# Altium PCB PCB V1.0.PcbDoc (part 2 of 3)
Units mil, origin at the board's own origin, x right, y up, seen from the top; angles counter-clockwise.
Board outline 1771.65 x 1771.65 mil, 6 copper layers (SIG/GND1, GND1, PWR, SIG/GND2, GND2, SIG/GND3), stack 60.866 mil thick; 267 components, 128 nets, 828 pads, 918 vias.
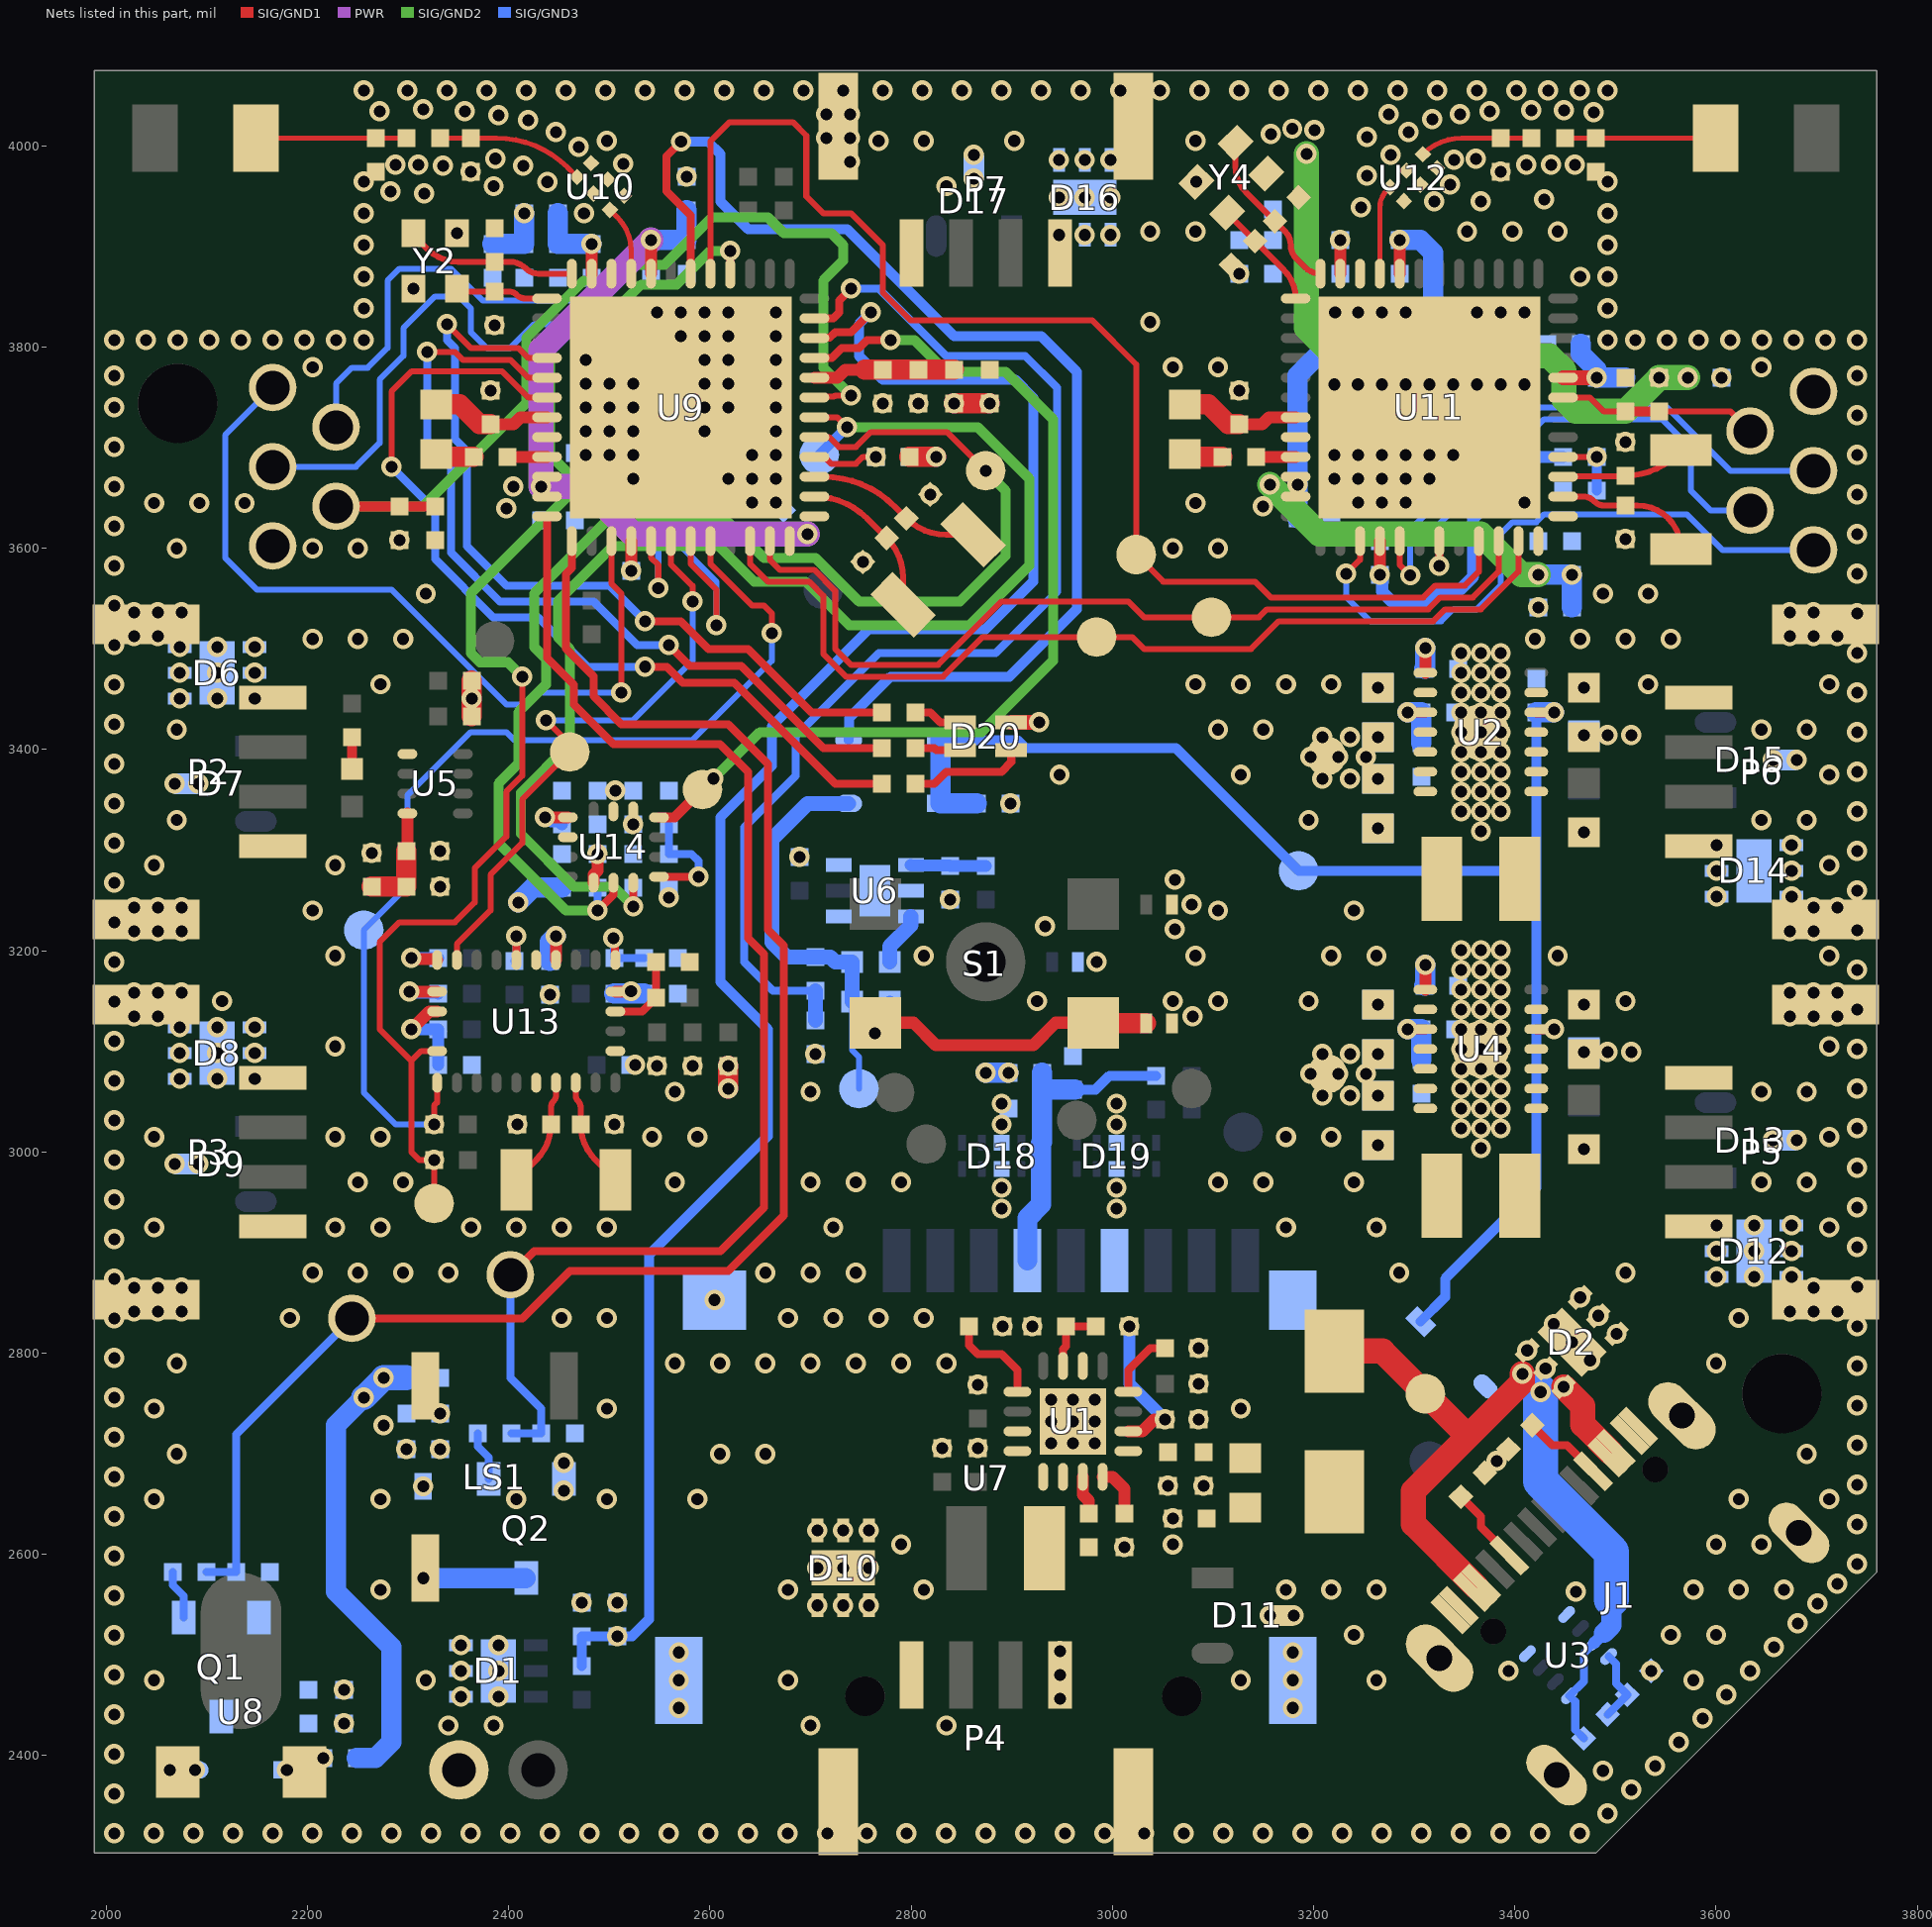
[diagram p6: the nets of this part, all layers, seen from the top]

## Via types
v1: diameter 20, hole 12, SIG/GND1 to SIG/GND3, tented both sides, 851 vias
v2: diameter 19.68, hole 11.81, SIG/GND1 to SIG/GND3, tented both sides, 67 vias

## Nets (pads, with @x,y where several pads share a name; then routed paths per layer and width w, separated by ;. In a path a pad name is that pad's centre, name@x,y a point inside that pad or via, vN(x,y) a via of type N, cw(c..) or ccw(c..) an arc to the next point about the centre after c; other vN are vias at no path point) (continued)
3V3_BZ: C34.1 C35.1 D22.1 FB7.2 LS1.1
  other v1: 2314.96,2667.72 2331.69,2704.72 2331.69,2740.16
3V3_EN: C25.2 D3.1 D4.1 D5.1 R12.1 T20.0 U2.12 U4.12 | length 1468.9
  SIG/GND1 w10: U4.12@3421.26,3122.05 v1(3438.98,3122.05) ; U2.12@3421.26,3437.01 v1(3438.98,3437.01)
  SIG/GND3 w10: D4.1@2829.13,3409.45 2905.51,3409.45 2913.39,3401.57 3062.99,3401.57 T20.0@3185.04,3279.53 3421.26,3279.53 ; D3.1@3306.29,2831.51 3330.71,2855.92 3330.71,2874.02 3421.26,2964.57 3421.26,3122.05 ; R12.1@3421.26,3437.01 3421.26,3279.53 ; v1(3438.98,3122.05) 3421.26,3122.05 ; 3421.26,3122.05 3421.26,3279.53
  SIG/GND3 w20: D4.1@2829.13,3409.45 D5.1@2829.13,3346.46 C25.2@2865.16,3346.46 ; R12.1@3421.26,3437.01 v1(3438.98,3437.01)
3V3_ERM: C32.1 C33.1 D21.1 FB6.2 U8.1
  other v1: 2179.53,2385.83 2215.55,2397.64 2236.22,2432.09
3V3_FB: R8.2 R9.2 U2.3 | length 62
  SIG/GND1 w10: v1(3293.31,3437.01) U2.3@3311.02,3437.01
  SIG/GND3 w20: v1(3293.31,3437.01) R9.2@3307.09,3437.01 R8.2@3307.09,3406.5
3V3_ICM: C86.1 C87.1 C88.1 FB15.1 R59.1 R60.1 R61.1 U14.5 U14.8 U14.12 | length 85.2
  SIG/GND1 w8: v1(2523.62,3325.79) U14.5@2523.62,3338.58
  SIG/GND1 w12: v1(2436.02,3332.68) U14.8@2458.66,3332.68 ; U14.12@2484.25,3267.72 2484.25,3275.81 2488.19,3279.75 v1(2488.19,3296.26)
  SIG/GND3 w12: v1(2436.02,3332.68) 2438.19,3332.68 2442.22,3328.65 2449.9,3328.65 C88.1@2452.76,3325.79
3V3_main: C11.1 C12.1 C13.1 C14.1 C36.1 C39.1 C40.1 C51.1 C58.1 C61.1 C62.1 C73.1 D20.2 FB4.1 FB5.1 FB6.1 FB7.1 FB8.2 FB9.2 FB10.1 FB11.2 FB12.2 FB13.1 FB14.1 FB15.2 R7.2 R8.1 R17.2 R18.2 R35.2 R36.2 R38.2 R39.2 T4.0 U2.4 U2.5 U9.40 U11.40 | length 1753.9
  SIG/GND1 w12: v1(2521.65,3577.76) U9.40@2521.65,3607.28 ; v1(3265.75,3573.82) U11.40@3265.75,3607.28
  SIG/GND1 w15: D20.2@2899.41,3427.17 v1(2927.17,3427.17)
  SIG/GND1 w20: R18.2@2363.19,3433.07 v1(2363.19,3450.79) R17.2@2363.19,3468.5 ; v1(2618.11,3062.99) v1(2618.11,3085.63) ; R36.2@2798.23,3690.94 v1(2824.8,3690.94) ; v1(2842.52,3744.09) v1(2877.95,3744.09)
  SIG/GND2 w25: v1(3192.91,3992.13) 3192.91,3818.9 3220.47,3791.34 3434.17,3791.34 3448.82,3776.69 3448.82,3748.03 3460.63,3736.22 3509.84,3736.22 v1(3543.31,3769.69) v1(3571.85,3769.68)
  SIG/GND3 w12: v1(3265.75,3573.82) 3268.05,3571.52 3268.05,3556.95 3277.75,3547.24 3314.96,3547.24 3326.77,3559.06 3345.55,3559.06 3358.27,3571.77 3358.27,3629.92 3419.29,3690.94 R39.2@3447.83,3690.94
  SIG/GND3 w20: FB6.1@2249.02,2397.64 2267.72,2397.64 2283.46,2413.39 2283.46,2507.87 2228.35,2562.99 2228.35,2728.35 v1(2255.91,2755.91) ; C39.1@2383.86,3902.56 C40.1@2415.35,3902.56 v1(2415.35,3933.07) ; v1(2409.45,3248.03) 2424.21,3262.8 FB15.2@2452.76,3262.8 ; v1(2874.02,3078.74) v1(2896.65,3078.74) ; v1(3543.31,3769.69) v1(3571.85,3769.68)
  SIG/GND3 w25: v1(2255.91,2755.91) v1(2275.59,2775.59) FB7.1@2298.23,2775.59
  other v1: 3085.63,2769.69 2263.78,3297.24 3208.66,3371.06 3236.22,3371.06 3263.78,3371.06 3196.85,3392.72 3224.41,3392.72 3251.97,3392.72 3208.66,3412.4 3236.22,3412.4 3263.78,3412.4 3423.23,3541.34 2291.34,3608.27 2576.77,3969.49 3157.48,4011.81 3200.79,4015.75 3178.68,4017.11
3V3_MCU1: C63.1 C64.1 C65.1 C66.1 C67.1 C68.1 FB13.2 U11.1 U11.20 U11.34 U11.35 U11.48 | length 810.1
  SIG/GND1 w12: U11.20@3285.43,3873.03 v1(3285.43,3906.5)
  SIG/GND2 w25: v1(3156.5,3663.39) 3205.71,3614.17 3366.14,3614.17 3406.5,3573.82 v1(3423.23,3573.82)
  SIG/GND3 w20: C65.1@3184.06,3629.92 v1(3184.06,3663.39) C67.1@3184.06,3696.85 3184.06,3771.9 3215.3,3803.15 3297.98,3803.15 3318.9,3824.07 3318.9,3893.7 3306.1,3906.5 v1(3285.43,3906.5) ; v1(3423.23,3573.82) v1(3456.69,3573.82) FB13.2@3456.69,3541.34
  other v1: 3149.61,3641.73
3V3_MCU2: C41.1 C42.1 C43.1 C44.1 C45.1 C46.1 FB10.2 U9.1 U9.20 U9.34 U9.35 U9.48 | length 673.1
  SIG/GND1 w12: U9.20@2541.34,3873.03 v1(2541.34,3906.5)
  PWR w25: v1(2541.34,3906.5) 2432.09,3797.24 v1(2432.09,3661.42) 2476.21,3661.42 2523.47,3614.15 v1(2696.87,3614.15)
  SIG/GND3 w20: v1(2541.34,3906.5) C41.1@2576.77,3906.5 FB10.2@2576.77,3936.02
  other v1: 2397.64,3639.76 2404.53,3661.42
3V3_RS485: C26.1 C27.1 FB4.2 U5.8 | length 107.5
  SIG/GND1 w12: C27.1@2298.23,3299.21 ccw(c2295.85,3301.59) 2299.21,3301.59 U5.8@2299.21,3336.61
  SIG/GND1 w20: FB4.2@2263.78,3263.78 C26.1@2298.23,3263.78 C27.1@2298.23,3299.21
3V3_SD: C30.1 C31.1 D18.1 D18.10 FB5.2 R27.1 U7.4 | length 309.4
  SIG/GND3 w10: C30.1@2962.6,3062.01 2983.27,3062.01 2997.05,3075.79 R27.1@3043.31,3075.79
  SIG/GND3 w20: U7.4@2915.55,2892.32 2915.55,2934.44 2929.13,2948.02 D18.1@2929.13,2983.07 D18.10@2929.13,3009.06 ; D18.10@2930.12,3010.04 C31.1@2930.12,3043.31 2930.12,3062.01 ; FB5.2@2930.12,3078.74 2930.12,3062.99 2931.1,3062.01 C30.1@2960.63,3062.01 C30.1@2962.6,3062.01
5V_FB: R13.1 R14.2 U4.3 | length 62
  SIG/GND1 w10: v1(3293.31,3122.05) U4.3@3311.02,3122.05
  SIG/GND3 w20: v1(3293.31,3122.05) R14.2@3307.09,3122.05 R13.1@3307.09,3091.54
5V_in: D2.4 D2.5 D2.6 D3.2 D26.2 J1.A4 J1.A9 J1.B4 J1.B9 R10.2 T5.0 U3.3 U3.5 | length 957.4
  SIG/GND1 w8: J1.A4@3358.14,2562.87 3362.32,2567.05 J1.B9@3366.5,2571.22 ; J1.B4@3491.77,2696.5 3495.95,2700.67 J1.A9@3500.12,2704.85
  SIG/GND1 w25: D26.2@3220.47,2802.17 3268.47,2802.17 3353.35,2717.29 ; J1.B9@3362.32,2567.05 3299.21,2630.15 3299.21,2663.15 3353.35,2717.29 ; v1(3407.48,2779.53) 3407.48,2771.42 3353.35,2717.29 ; v1(3448.48,2766.62) 3467.52,2747.58 3467.52,2729.1 J1.A9@3495.95,2700.67
  SIG/GND3 w8: R10.2@3468.48,2417.3 3459.97,2425.82 3459.97,2453.82 U3.5@3454.15,2459.63 3468.5,2473.99 3468.5,2501.83 U3.3@3479.2,2512.53
  SIG/GND3 w12: U3.3@3479.2,2512.53 3488.68,2522.01
  SIG/GND3 w20: 3488.68,2522.01 3496.06,2529.39 3496.06,2555.12
  SIG/GND3 w35: v1(3425.58,2761.43) 3425.58,2672.85 3496.06,2602.36 3496.06,2555.12
  other v1: 3430.39,2784.72 3412.29,2802.81
5V_main: C18.1 C19.1 C20.1 C21.1 D6.4 D6.5 D6.6 D8.4 D8.5 D8.6 D10.4 D10.5 D10.6 D12.4 D12.5 D12.6 D14.4 D14.5 D14.6 D16.4 D16.5 D16.6 P2.1 P3.1 P4.1 P5.1 P6.1 P7.1 R13.2 T19.0 U4.4 U4.5
  other v1: 2706.69,2549.41 2732.28,2549.41 2757.87,2549.41 3600.59,2875.98 3600.59,2901.57 3600.59,2927.17 3208.66,3056.1 3236.22,3056.1 3263.78,3056.1 2147.44,3072.83 3196.85,3077.76 3224.41,3077.76 3251.97,3077.76 3208.66,3097.44 3236.22,3097.44 3263.78,3097.44 2147.44,3098.43 2147.44,3124.02 3600.59,3253.94 3600.59,3279.53 3600.59,3305.12 2147.44,3450.79 2147.44,3476.38 2147.44,3501.97 2946.85,3911.61 2972.44,3911.61 2998.03,3911.61
BAT_SENS: C7.1 R2.1 R4.2 U9.10 | length 1888.5
  SIG/GND1 w8: U9.10@2703.74,3809.06 2704.09,3809.41 2718.86,3809.41 2724.41,3814.96 2740.16,3814.96 v1(2759.84,3834.65)
  SIG/GND3 w10: R2.1@2472.44,2489.17 R4.2@2472.44,2518.7 v1(2507.87,2518.7) 2522.64,2518.7 2539.37,2535.43 2539.37,2897.64 2657.48,3015.75 2657.48,3122.05 2610.24,3169.29 2610.24,3332.62 2661.42,3383.8 2661.42,3423.17 2757.93,3519.68 2874.02,3519.68 2921.26,3566.93 2921.26,3749.92 2903.47,3767.72 2771.65,3767.72 2748.03,3791.34 2748.03,3822.83 v1(2759.84,3834.65)
BNO_INT: T33.0 U9.42 U13.14 | length 592.6
  SIG/GND1 w6: U13.14@2348.43,3190.94 2348.43,3206.69 2381.89,3240.16 2381.89,3275.59 2413.39,3307.09 2413.39,3350.39 T33.0@2460.63,3397.64 2460.63,3405.51 v1(2437.01,3429.13) ; U9.42@2561.02,3607.28 2561.02,3584.33 2582.68,3562.68 v1(2582.68,3547.24)
  SIG/GND3 w6: v1(2437.01,3429.13) 2523.62,3429.13 2582.68,3488.19 v1(2582.68,3547.24)
BNO_RST: R43.1 U13.11 | length 49
  SIG/GND1 w8: U13.11@2407.48,3190.94 v1(2407.48,3214.57)
  SIG/GND3 w8: R43.1@2405.51,3189.96 2407.43,3191.88 2407.43,3214.52 v1(2407.48,3214.57)
BNO_SCL: R57.2 T32.0 U9.16 U13.19 | length 1326.9
  SIG/GND1 w6: T32.0@2325.79,2948.82 v1(2325.79,2992.13) 2311.02,2992.13 2303.15,3000 2303.15,3090.55 ; U13.19@2328.74,3100.39 2312.99,3100.39 2303.15,3090.55 ; v1(2413.39,3472.44) 2413.39,3374.02 2397.64,3358.27 2397.64,3313.61 2366.14,3282.11 2366.14,3248.03 2346.46,3228.35 2291.34,3228.35 2271.65,3208.66 2271.65,3122.05 2303.15,3090.55
  SIG/GND1 w8: U9.16@2620.08,3873.03 v1(2620.08,3895.67)
  SIG/GND2 w10: v1(2413.39,3472.44) 2398.95,3486.87 2371.39,3486.87 2362.2,3496.06 2362.2,3555.12 2456.69,3649.61 2456.69,3677.17 2440.94,3692.91 2440.94,3799.21 2484.25,3842.52 2511.81,3842.52 2531.5,3862.2 2566.93,3862.2 2600.39,3895.67 v1(2620.08,3895.67)
BNO_SDA: R56.2 T31.0 U9.44 U13.20 | length 1014.2
  SIG/GND1 w6: v1(2325.79,3027.56) 2325.79,3046.26 2328.74,3049.21 U13.20@2328.74,3068.9 ; U9.44@2600.39,3607.28 2600.39,3584.65 2641.73,3543.31 2653.54,3543.31 2661.42,3535.43 v1(2661.42,3515.75)
  SIG/GND3 w6: v1(2325.79,3027.56) 2287.4,3027.56 2255.91,3059.06 T31.0@2255.91,3220.47 2299.21,3263.78 2299.21,3354.33 2362.2,3417.32 2397.64,3417.32 2405.51,3409.45 2582.68,3409.45 2661.42,3488.19 v1(2661.42,3515.75)
Buzzer_PWM: R33.1 R34.2 T8.0 U9.36 | length 1317.7
  SIG/GND1 w8: T8.0@2401.57,2877.95 2425.2,2901.57 2610.24,2901.57 2653.54,2944.88 2653.54,3196.85 2637.8,3212.6 2637.8,3377.67 2609.96,3405.51 2503.94,3405.51 2464.57,3444.88 2464.57,3464.57 2437.99,3491.14 U9.36@2437.99,3631.89
  SIG/GND3 w8: T8.0@2401.57,2877.95 2401.57,2775.59 2432.09,2745.08 R34.2@2432.09,2720.47 R33.1@2402.56,2720.47
ERM_EN: R30.1 R31.2 T7.0 U9.37 | length 1625.4
  SIG/GND1 w8: T7.0@2244.09,2834.65 2413.39,2834.65 2460.63,2881.89 2618.39,2881.89 2673.23,2936.73 2673.23,3205 2657.48,3220.75 2657.48,3385.83 2618.11,3425.2 2512.09,3425.2 2484.25,3453.04 2484.25,3472.72 2456.69,3500.28 2456.69,3574.8 2462.6,3580.71 U9.37@2462.6,3607.28
  SIG/GND3 w8: R30.1@2099.41,2582.68 R31.2@2128.94,2582.68 2128.94,2719.49 T7.0@2244.09,2834.65
GND: C1.2 C3.2 C4.2 C5.2 C6.2 C7.2 C8.2 C9.2 C10.1 C11.2 C12.2 C13.2 C14.2 C15.2 C16.2 C17.2 C18.2 C19.2 C20.2 C21.2 C22.2 C23.2 C24.2 C25.1 C26.2 C27.2 C28.2 C29.2 C30.2 C31.2 C32.2 C33.2 C34.2 C35.2 C36.2 C37.2 C38.2 C39.2 C40.2 C41.2 C42.2 C43.2 C44.2 C45.2 C46.2 C47.2 C48.2 C49.2 C50.2 C51.2 C52.2 C53.2 C54.2 C55.2 C56.2 C57.2 C58.2 C59.2 C60.2 C61.2 C62.2 C63.2 C64.2 C65.2 C66.2 C67.2 C68.2 C69.2 C70.2 C71.2 C72.2 C73.2 C74.2 C75.2 C76.2 C77.2 C78.2 C79.2 C80.2 C81.2 C82.2 C83.2 C84.2 C85.2 C86.2 C87.2 C88.2 D1.1 D1.2 D1.3 D1.7 D2.1 D2.2 D2.3 D2.7 D6.1 D6.2 D6.3 D6.7 D7.3 D8.1 D8.2 D8.3 D8.7 D9.3 D10.1 D10.2 D10.3 D10.7 D11.3 D12.1 D12.2 D12.3 D12.7 D13.3 D14.1 D14.2 D14.3 D14.7 D15.3 D16.1 D16.2 D16.3 D16.7 D17.3 D18.3 D18.8 D19.3 D19.8 D23.2 D24.2 D25.2 J1.A1 J1.A12 J1.B1 J1.B12 J1.S1 J1.S2 J1.S3 J1.S4 P2.4 P2.5 P2.6 P3.4 P3.5 P3.6 P4.4 P4.5 P4.6 P5.4 P5.5 P5.6 P6.4 P6.5 P6.6 P7.4 P7.5 P7.6 Q1.S Q2.S R3.1 R4.1 R5.1 R6.1 R9.1 R11.1 R12.2 R14.1 R24.2 R31.1 R34.1 R37.1 R40.1 R42.1 R47.1 R48.1 R49.1 R58.2 R66.1 R67.1 T2.0 T13.0 T18.0 U1.6 U1.11 U1.12 U1.17 U2.2 U2.13 U2.15 U3.1 U3.8 U4.2 U4.13 U4.15 U5.5 U6.2 U6.4 U6.6 U6.7 U7.6 U7.10 U7.11 U7.12 U7.13 U9.22 U9.32 U9.49 U10.A2 U10.B1 U10.B2 U10.B3 U11.22 U11.32 U11.49 U12.A2 U12.B1 U12.B2 U12.B3 U13.2 U13.10 U13.25 U14.6 Y2.2 Y2.4 Y4.2 Y4.4
  other v1: 2007.87,2322.83 2047.24,2322.83 2086.61,2322.83 2125.98,2322.83 2165.35,2322.83 2204.72,2322.83 2244.09,2322.83 2283.46,2322.83 2322.83,2322.83 2362.2,2322.83 2401.57,2322.83 2440.95,2322.83 2480.32,2322.83 2519.69,2322.83 2559.06,2322.83 2598.43,2322.83 2637.8,2322.83 2677.17,2322.83 2716.54,2322.83 2755.91,2322.83 2795.28,2322.83 2834.65,2322.83 2874.02,2322.83 2913.39,2322.83 2952.76,2322.83 2992.13,2322.83 3031.5,2322.83 3070.87,2322.83 3110.24,2322.83 3149.61,2322.83 3188.98,2322.83 3228.35,2322.83 3267.72,2322.83 3307.09,2322.83 3346.46,2322.83 3385.83,2322.83 3425.2,2322.83 3464.57,2322.83 3492.13,2342.52 2007.87,2362.2 3515.75,2366.14 3487.5,2385 3539.37,2389.76 2007.87,2401.57 3562.99,2413.39 2340,2430 2385,2430 2700,2430 2835,2430 3586.61,2437.01 2007.87,2440.94 2569.09,2447.44 3179.33,2447.44 2947.83,2456.69 2352.56,2458.66 2389.76,2458.66 3610.24,2460.63 2236.22,2465.55 2047.5,2475 2317.5,2475 2569.09,2475 2677.5,2475 3127.5,2475 3179.33,2475 3262.5,2475 3577.5,2475 2007.87,2480.32 2947.83,2480.31 2352.56,2484.25 2389.76,2484.25 3393.7,2484.25 3535.45,2484.27 3633.86,2484.25 2569.09,2502.56 3179.33,2502.56 2947.83,2503.94 3657.48,2507.87 2352.56,2509.84 2389.76,2509.84 2007.87,2519.69 3240,2520 3555,2520 3600,2520 3681.1,2531.5 3156.52,2539.37 3180.14,2539.37 3700.79,2551.18 2472.44,2552.17 2507.87,2552.17 2007.87,2559.06 3460.63,2562.99 2272.5,2565 2677.5,2565 2812.5,2565 3172.5,2565 3217.5,2565 3262.5,2565 3577.5,2565 3622.5,2565 3667.5,2565 3720.47,2570.87 2706.69,2586.61 2732.28,2586.61 2757.87,2586.61 3740.16,2590.55 2007.87,2598.43 3011.81,2607.28 2790,2610 3060,2610 3600,2610 3645,2610 2706.69,2623.82 2732.28,2623.82 2757.87,2623.82 3740.16,2629.92 3060.04,2635.83 2007.87,2637.8 2047.5,2655 2272.5,2655 2407.5,2655 2497.5,2655 2587.5,2655 3622.5,2655 3712.5,2655 2454.72,2663.39 3055.12,2668.31 3090.55,2668.31 3740.16,2669.29 2007.87,2677.17 2454.72,2690.94 3381.89,2692.91 2070,2700 2610,2700 2655,2700 3690,2700 2298.23,2704.72 2830.71,2705.71 2866.14,2705.71 3740.16,2708.66 2938.98,2710.63 2960.63,2710.63 2982.28,2710.63 2007.87,2716.54 2275.59,2728.35 2938.98,2732.28 2960.63,2732.28 2982.28,2732.28 3085.63,2734.25 2047.5,2745 2497.5,2745 3127.5,2745 3740.16,2748.03 2938.98,2753.94 2960.63,2753.94 2982.28,2753.94 2007.87,2755.91 2866.14,2768.7 3740.16,2787.4 2070,2790 2565,2790 2610,2790 2655,2790 2700,2790 2745,2790 2790,2790 2835,2790 3600,2790 3474.79,2792.93 2007.87,2795.28 3085.63,2805.12 3456.69,2811.02 3501.1,2819.24 2890.75,2826.77 2920.28,2826.77 3740.16,2826.77 3438.6,2829.12 2007.87,2834.65 2182.5,2835 2452.5,2835 2497.5,2835 2677.5,2835 2722.5,2835 2767.5,2835 2812.5,2835 3622.5,2835 3483,2837.33 2027.56,2841.54 2051.18,2841.54 2074.8,2841.54 3673.23,2841.54 3696.85,2841.54 3720.47,2841.54 2604.53,2852.95 3464.91,2855.43 2027.56,2865.16 2051.18,2865.16 2074.8,2865.16 3696.85,2865.16 3740.16,2866.14 2007.87,2874.02 3637.8,2875.98 3675,2875.98 2205,2880 2250,2880 2295,2880 2340,2880 2655,2880 2700,2880 2745,2880 3285,2880 3510,2880 3637.8,2901.57 3675,2901.57 3740.16,2905.51 2007.87,2913.39 2047.5,2925 2227.5,2925 2272.5,2925 2362.5,2925 2407.5,2925 2452.5,2925 2497.5,2925 2722.5,2925 3172.5,2925 3262.5,2925 3712.5,2925 3637.8,2927.17 3675,2927.17 3740.16,2944.88 2007.87,2952.76 2250,2970 2295,2970 2565,2970 2700,2970 2745,2970 2790,2970 3105,2970 3150,2970 3240,2970 3645,2970 3690,2970 3740.16,2984.25 2067.89,2988.19 2091.52,2988.19 2007.87,2992.13 3468.5,3002.95 3263.78,3006.89 3656.52,3011.81 3680.14,3011.81 2047.5,3015 2227.5,3015 2272.5,3015 2542.5,3015 2587.5,3015 3172.5,3015 3217.5,3015 3712.5,3015 3740.16,3023.62 2408.46,3027.56 2504.92,3027.56 2007.87,3031.5 2565,3060 2700,3060 3645,3060 3690,3060 3740.16,3062.99 2007.87,3070.87 2073.03,3072.83 2110.24,3072.83 2547.24,3085.63 2582.68,3085.63 2525.59,3086.61 2704.72,3097.44 2073.03,3098.43 2110.24,3098.43 3740.16,3102.36 2227.5,3105 3712.5,3105 2007.87,3110.24 2073.03,3124.02 2110.24,3124.02 2027.56,3134.84 2051.18,3134.84 3079.72,3134.84 3673.23,3134.84 3696.85,3134.84 3720.47,3134.84 3740.16,3141.73 3263.78,3146.65 3468.5,3146.65 2007.87,3149.61 2115,3150 2925,3150 3060,3150 3105,3150 3195,3150 3510,3150 2440.94,3156.5 2027.56,3158.46 2051.18,3158.46 2074.8,3158.46 3673.23,3158.46 3696.85,3158.46 3720.47,3158.46 3740.16,3181.1 2007.87,3188.98 2984.25,3188.98 2227.5,3195 2812.5,3195 3082.5,3195 3217.5,3195 3262.5,3195 3442.5,3195 3712.5,3195 2027.56,3219.49 2051.18,3219.49 2074.8,3219.49 3673.23,3219.49 3696.85,3219.49 3740.16,3220.47 3062.01,3221.46 2933.07,3224.41 2007.87,3228.35 2205,3240 3105,3240 3240,3240 2027.56,3243.11 2051.18,3243.11 2074.8,3243.11 3696.85,3243.11 3720.47,3243.11 3078.74,3246.06 2838.58,3250.98 2559.06,3252.95 3675,3253.94 3740.16,3259.84 2331.69,3263.78 2007.87,3267.72 3062.01,3270.67 3675,3279.53 2047.5,3285 2227.5,3285 3712.5,3285 2688.98,3293.31 2331.69,3299.21 3740.16,3299.21 3675,3305.12 2007.87,3307.09 3468.5,3317.91 3263.78,3321.85 2070,3330 3195,3330 3645,3330 3690,3330 3740.16,3338.58 2007.87,3346.46 2898.62,3346.46 2505.91,3359.25 2067.89,3366.14 2091.52,3366.14 2947.5,3375 3127.5,3375 3712.5,3375 3740.16,3377.95 2007.87,3385.83 3656.52,3389.76 3680.14,3389.76 3740.16,3417.32 2070,3420 3105,3420 3150,3420 3645,3420 3690,3420 2007.87,3425.2 2073.03,3450.79 2110.24,3450.79 3740.16,3456.69 3263.78,3461.61 3468.5,3461.61 2007.87,3464.57 2272.5,3465 3082.5,3465 3127.5,3465 3172.5,3465 3217.5,3465 3532.5,3465 3712.5,3465 2073.03,3476.38 2110.24,3476.38 3740.16,3496.06 2073.03,3501.97 2110.24,3501.97 2007.87,3503.94 2205,3510 2250,3510 2295,3510 3420,3510 3465,3510 3510,3510 3555,3510 2027.56,3512.8 2051.18,3512.8 3673.23,3512.8 3696.85,3512.8 3720.47,3512.8 3740.16,3535.43 2027.56,3536.42 2051.18,3536.42 2074.8,3536.42 3673.23,3536.42 3696.85,3536.42 2007.87,3543.31 2317.5,3555 3487.5,3555 3532.5,3555 3740.16,3574.8 2007.87,3582.68 2751.95,3586.59 2070,3600 2205,3600 2250,3600 3060,3600 3105,3600 3509.84,3609.25 3740.16,3614.17 2007.87,3622.05 2047.5,3645 2092.5,3645 2137.5,3645 3082.5,3645 2641.73,3645.67 2665.35,3645.67 3244.09,3645.67 3267.72,3645.67 3291.34,3645.67 3409.45,3645.67 2818.92,3653.56 3740.16,3653.54 2007.87,3661.42 2523.62,3669.29 2618.11,3669.29 2641.73,3669.29 2665.35,3669.29 3220.47,3669.29 3244.09,3669.29 3267.72,3669.29 3291.34,3669.29 3314.96,3669.29 2476.38,3692.91 2500,3692.91 2523.62,3692.91 2641.73,3692.91 2665.35,3692.91 3220.47,3692.91 3244.09,3692.91 3267.72,3692.91 3291.34,3692.91 3314.96,3692.91 3338.58,3692.91 3740.16,3692.91 2007.87,3700.79 3509.84,3705.71 2476.38,3716.54 2500,3716.54 2523.62,3716.54 2594.49,3716.54 2665.35,3716.54 3740.16,3732.28 2007.87,3740.16 2476.38,3740.16 2500,3740.16 2523.62,3740.16 2594.49,3740.16 2618.11,3740.16 2665.35,3740.16 2771.65,3744.09 2807.09,3744.09 2381.89,3756.89 3125.98,3756.89 3220.47,3762.84 3244,3762.84 3267.72,3762.84 3291.34,3762.84 3314.96,3762.84 3338.58,3762.84 3362.2,3762.84 3385.83,3762.84 3409.45,3762.84 2476.38,3763.78 2500,3763.78 2523.62,3763.78 2594.49,3763.78 2618.11,3763.78 2665.35,3763.78 3605.32,3769.68 2007.87,3771.65 3740.16,3771.65 2205,3780 3060,3780 3105,3780 3645,3780 2476.38,3787.4 2594.49,3787.4 2618.11,3787.4 2665.35,3787.4 2007.87,3807.09 2039.37,3807.09 2070.87,3807.09 2102.36,3807.09 2133.86,3807.09 2165.35,3807.09 2196.85,3807.09 2228.35,3807.09 2255.91,3807.09 3492.13,3807.09 3519.69,3807.09 3551.18,3807.09 3582.68,3807.09 3614.17,3807.09 3645.67,3807.09 3677.17,3807.09 3708.66,3807.09 3740.16,3807.09 2570.87,3811.02 2594.49,3811.02 2618.11,3811.02 2665.35,3811.02 2385.83,3821.85 3037.5,3825 2547.24,3834.65 2570.87,3834.65 2594.49,3834.65 2618.11,3834.65 2665.35,3834.65 3221.41,3834.65 3244.09,3834.65 3267.72,3834.65 3291.34,3834.65 3362.2,3834.65 3385.83,3834.65 3409.45,3834.65 2255.91,3838.58 3492.13,3838.58 2305.12,3858.27 2255.91,3870.08 3465,3870 3492.13,3870.08 3125.98,3873.03 2255.91,3901.57 3492.13,3901.57 2348.43,3913.39 3037.5,3915 3082.5,3915 3352.5,3915 3397.5,3915 3442.5,3915 2255.91,3933.07 2474.82,3933.07 3492.13,3933.07 3247.05,3938.98 3319.88,3944.88 3366.14,3944.88 3429.13,3946.85 2946.85,3948.82 2972.44,3948.82 2998.03,3948.82 2315.94,3952.76 2282.48,3954.72 2385,3960 2835,3960 3335.63,3961.61 2438.43,3964.27 3083.31,3964.33 2255.91,3964.57 3492.13,3964.57 2862.2,3967.54 3252.95,3970.47 2362.2,3974.41 3385.83,3974.41 2334.65,3980.32 2414.37,3980.32 2287.4,3981.3 2310.04,3981.3 3411.42,3981.3 3436.02,3981.3 3459.65,3981.3 2513.78,3982.28 2739.17,3984.25 2946.85,3986.02 2972.44,3986.02 2998.03,3986.02 3339.57,3986.22 2386.76,3987.26 3361.22,3987.2 2862.2,3991.16 3276.57,3991.14 2469.49,3999.02 2497.5,4005 2767.5,4005 2812.5,4005 2902.5,4005 3082.5,4005 2715.55,4007.87 2739.17,4007.87 3252.95,4008.86 2446.85,4013.78 3294.29,4013.78 2419.29,4025.59 3317.91,4026.57 2389.76,4030.51 2715.55,4031.5 2739.17,4031.5 3274.61,4031.5 3345.47,4031.5 3478.35,4033.46 2271.65,4034.45 2356.3,4034.45 3375,4034.45 3416.34,4035.43 3448.82,4035.43 2314.96,4036.42 2255.91,4055.12 2299.21,4055.12 2338.58,4055.12 2377.95,4055.12 2417.32,4055.12 2456.69,4055.12 2496.06,4055.12 2535.43,4055.12 2574.8,4055.12 2614.17,4055.12 2653.54,4055.12 2692.91,4055.12 2732.28,4055.12 2771.65,4055.12 2811.02,4055.12 2850.39,4055.12 2889.76,4055.12 2929.13,4055.12 2968.5,4055.12 3007.87,4055.12 3047.24,4055.12 3086.61,4055.12 3125.98,4055.12 3165.35,4055.12 3204.72,4055.12 3244.09,4055.12 3283.47,4055.12 3322.84,4055.12 3362.21,4055.12 3401.58,4055.12 3433.07,4055.12 3464.57,4055.12 3492.13,4055.12
  other v2: 2889.76,2943.9 3003.94,2943.9 2889.76,2964.57 3003.94,2964.57 3366.14,3003.94 3346.46,3023.62 3366.14,3023.62 3385.83,3023.62 2889.76,3027.56 3003.94,3027.56 3346.46,3043.31 3366.14,3043.31 3385.83,3043.31 2889.76,3048.23 3003.94,3048.23 3346.46,3062.99 3366.14,3062.99 3385.83,3062.99 3346.46,3082.68 3366.14,3082.68 3385.83,3082.68 3346.46,3102.36 3366.14,3102.36 3385.83,3102.36 3346.46,3122.05 3366.14,3122.05 3385.83,3122.05 3346.46,3141.73 3366.14,3141.73 3385.83,3141.73 3346.46,3161.42 3366.14,3161.42 3385.83,3161.42 3346.46,3181.1 3366.14,3181.1 3385.83,3181.1 3346.46,3200.79 3366.14,3200.79 3385.83,3200.79 3366.14,3318.9 3346.46,3338.58 3366.14,3338.58 3385.83,3338.58 3346.46,3358.27 3366.14,3358.27 3385.83,3358.27 3346.46,3377.95 3366.14,3377.95 3385.83,3377.95 3346.46,3397.64 3366.14,3397.64 3385.83,3397.64 3346.46,3417.32 3366.14,3417.32 3385.83,3417.32 3346.46,3437.01 3366.14,3437.01 3385.83,3437.01 3346.46,3456.69 3366.14,3456.69 3385.83,3456.69 3346.46,3476.38 3366.14,3476.38 3385.83,3476.38 3346.46,3496.06 3366.14,3496.06 3385.83,3496.06
ICM_INT1: T36.0 U9.9 U14.4 | length 973.5
  SIG/GND1 w8: U9.9@2703.74,3789.37 2720.89,3789.37 2730.74,3799.21 2748.03,3799.21 2755.91,3807.09 v1(2779.53,3807.09)
  SIG/GND1 w10: U14.4@2549.21,3332.68 2564.96,3332.68 v1(2603.41,3371.12)
  SIG/GND2 w10: v1(2603.41,3371.12) 2649.61,3417.32 2870.08,3417.32 2940.94,3488.19 2940.94,3728.35 2893.7,3775.59 2834.65,3775.59 2803.15,3807.09 v1(2779.53,3807.09)
ICM_INT2/FSYNC: U14.9
ICM_SCL: R61.2 T35.0 U9.5 U14.13 | length 1293.8
  SIG/GND1 w6: U9.5@2703.74,3710.63 2718.32,3710.63 2728.16,3700.79 2745.08,3700.79 2759.84,3715.55 2835.63,3715.55 v1(2874.02,3677.17)
  SIG/GND1 w8: v1(2488.19,3240.16) 2503.94,3255.91 U14.13@2503.94,3267.72
  SIG/GND2 w10: v1(2488.19,3240.16) 2456.69,3240.16 2389.76,3307.09 2389.76,3366.14 2409.45,3385.83 2409.45,3437.01 2437.01,3464.57 2437.01,3490.22 2425.2,3502.03 2425.2,3555.12 2496.06,3625.98 2618.11,3625.98 2653.54,3590.55 2704.72,3590.55 2748.03,3547.24 2848.48,3547.24 2893.7,3592.46 2893.7,3657.48 v1(2874.02,3677.17)
  SIG/GND3 w8: v1(2488.19,3240.16) R61.2@2488.19,3262.8
ICM_SDA: R60.2 T34.0 U9.6 U14.14 | length 1352.9
  SIG/GND1 w6: U9.6@2703.74,3730.32 2726.38,3730.32 v1(2736.22,3720.47)
  SIG/GND1 w8: U14.14@2523.62,3267.72 2523.68,3267.66 v1(2523.74,3244.08) v1(2523.74,3244.08)
  SIG/GND2 w10: v1(2523.74,3244.08) 2504.04,3263.78 2464.57,3263.78 2412.03,3316.31 2412.03,3356.92 2460.63,3405.51 2460.63,3500 2448.82,3511.81 2448.82,3547.24 2503.94,3602.36 2608.33,3602.36 2643.76,3566.93 2694.94,3566.93 2738.25,3523.62 2858.27,3523.62 2917.32,3582.68 2917.32,3669.29 2866.14,3720.47 v1(2736.22,3720.47)
  SIG/GND3 w8: R60.2@2523.62,3262.8 2523.68,3262.74 v1(2523.74,3244.08) v1(2523.74,3244.08)
  SIG/GND3 w10: T34.0@2708.66,3692.91 v1(2736.22,3720.47)
IMU_XIN32: C84.1 U13.27 Y5.1 | length 109.9
  SIG/GND1 w6: U13.27@2466.54,3068.9 2466.54,3055.93 ccw(c2473.26,3055.93) 2468.5,3051.18 cw(c2461.38,3044.05) 2471.46,3044.05 C84.1@2471.46,3027.56 ccw(c2521.36,3027.56) 2486.07,2992.27 Y5.1@2505.91,2972.44
IMU_XOUT32: C85.1 U13.26 Y5.2 | length 109.9
  SIG/GND1 w6: Y5.2@2407.48,2972.44 2427.31,2992.27 ccw(c2392.03,3027.56) C85.1@2441.93,3027.56 2441.93,3044.05 cw(c2452.01,3044.05) 2444.88,3051.18 ccw(c2440.13,3055.93) 2446.85,3055.93 U13.26@2446.85,3068.9
MCU1_ANT: U11.21 U12.A3 | length 89.2
  SIG/GND1 w5.12: U11.21@3265.75,3873.03 3265.75,3938.5 cw(c3291,3938.5) 3273.14,3956.35 U12.A3@3275.91,3959.12
MCU1_BOOT0: R39.1 R40.2 U11.4 | length 66.9
  SIG/GND1 w6: U11.4@3447.83,3690.94 v1(3481.3,3690.94)
  SIG/GND3 w10: R40.2@3481.3,3657.48 v1(3481.3,3690.94)
MCU1_NRST: C70.1 R38.1 T16.0 U11.7 | length 199.9
  SIG/GND1 w6: U11.7@3447.83,3750 3474.41,3750 3488.19,3736.22 C70.1@3509.84,3736.22 ; R38.1@3543.31,3736.22 3614.17,3736.22 T16.0@3633.86,3716.54
  SIG/GND1 w10: C70.1@3509.84,3736.22 R38.1@3543.31,3736.22
MCU1_PA13_CLK: T15.0 U11.41 | length 561.2
  SIG/GND1 w6: U11.41@3285.43,3607.28 3285.43,3583.78 v1(3295.97,3573.24)
  SIG/GND3 w6: v1(3295.97,3573.24) 3295.97,3618.81 3417.32,3740.16 3551.18,3740.16 3614.17,3677.17 T15.0@3696.85,3677.17
MCU1_PA13_DIO: T14.0 U11.39 | length 624.5
  SIG/GND1 w6: v1(3232.28,3574.8) 3246.06,3588.58 U11.39@3246.06,3607.28
  SIG/GND3 w6: v1(3232.28,3574.8) 3232.28,3551.71 3256.43,3527.56 3326.77,3527.56 3338.58,3539.37 3362.2,3539.37 3385.83,3562.99 3385.83,3614.17 3397.64,3625.98 3421.26,3625.98 3429.13,3633.86 3570.87,3633.86 3606.3,3598.43 T14.0@3696.85,3598.43
MCU1_PB3_SWO: T17.0 U11.43 | length 480.5
  SIG/GND1 w8: v1(3324.8,3582.68) U11.43@3324.8,3607.28
  SIG/GND3 w6: v1(3324.8,3582.68) 3324.8,3624.02 3429.13,3728.35 3546.29,3728.35 3574.8,3699.83 3574.8,3657.48 3594.49,3637.8 T17.0@3633.86,3637.8
MCU1_VFBSMPS: C69.1 L8.1 U11.31 | length 121.2
  SIG/GND1 w12: C69.1@3125.98,3723.43 3139.76,3723.43 3148.62,3723.43 3155.51,3730.32 U11.31@3182.09,3730.32
  SIG/GND1 w20: L8.1@3071.85,3743.11 3095.47,3743.11 3115.16,3723.43 C69.1@3125.98,3723.43
MCU1_VLXSMPS: L7.2 U11.33 | length 39.4
  SIG/GND1 w12: L7.2@3142.72,3690.94 U11.33@3182.09,3690.94
MCU2_ANT: U9.21 U10.A3 | length 70.1
  SIG/GND1 w5.12: U10.A3@2500.59,3936.41 2507.87,3929.13 cw(c2474.61,3895.87) 2521.65,3895.87 U9.21@2521.65,3873.03
MCU2_BOOT0: R36.1 R37.2 U9.4 | length 66.7
  SIG/GND1 w6: U9.4@2703.74,3690.94 2705,3689.69 2714.84,3689.69 2720.47,3684.06 2745.08,3684.06 2751.97,3690.94 v1(2764.76,3690.94)
MCU2_NRST: C48.1 R35.1 T11.0 U9.7 | length 977.3
  SIG/GND1 w6: U9.7@2703.74,3750 2704.48,3750.74 2723.18,3750.74 2724.41,3751.97 v1(2740.16,3751.97)
  SIG/GND1 w10: T11.0@2228.35,3641.73 R35.1@2291.34,3641.73 C48.1@2326.77,3641.73
  SIG/GND2 w10: T11.0@2228.35,3641.73 2314.96,3641.73 2417.32,3744.09 2417.32,3809 2474.47,3866.14 2503.94,3866.14 2519.68,3881.89 2555.12,3881.89 2602.36,3929.13 2657.48,3929.13 2673.23,3913.39 2720.47,3913.39 2732.28,3901.57 2732.28,3885.83 2712.6,3866.14 2712.6,3779.53 v1(2740.16,3751.97)
MCU2_PA13_CLK: T10.0 U9.41 | length 832.4
  SIG/GND1 w6: U9.41@2541.34,3607.28 2541.34,3590.83 2548.55,3583.62 v1(2548.55,3560.56)
  SIG/GND3 w6: T10.0@2165.35,3681.1 2248.03,3681.1 2271.65,3704.72 2271.65,3767.72 2295.28,3791.34 2295.28,3818.9 2326.77,3850.39 2350.39,3850.39 2362.2,3838.58 2362.2,3814.96 2377.95,3799.21 2401.57,3799.21 2425.2,3822.83 2496.06,3822.83 2548.55,3770.35 v1(2548.55,3560.56)
MCU2_PA13_DIO: T9.0 U9.39 | length 802.5
  SIG/GND1 w6: U9.39@2501.97,3607.28 2501.97,3564.96 2511.81,3555.12 v1(2511.81,3456.69)
  SIG/GND3 w6: T9.0@2165.35,3759.84 2118.11,3712.6 2118.11,3590.55 2149.61,3559.06 2283.46,3559.06 2397.64,3444.88 2417.32,3444.88 2429.13,3456.69 v1(2511.81,3456.69)
MCU2_PB3_SWO: T12.0 U9.43 | length 873.3
  SIG/GND1 w6: U9.43@2580.71,3607.28 2580.71,3584.65 2606.3,3559.06 v1(2606.3,3523.62)
  SIG/GND3 w6: T12.0@2228.35,3720.47 2228.35,3763.78 2244.09,3779.53 2259.84,3779.53 2279.53,3799.21 2279.53,3866.14 2291.34,3877.95 2342.52,3877.95 2374.02,3846.46 2496.06,3846.46 2562.99,3779.53 2562.99,3610.24 2606.3,3566.93 v1(2606.3,3523.62)
MCU2_VFBSMPS: C47.1 L5.1 U9.31 | length 121.2
  SIG/GND1 w12: C47.1@2381.89,3723.43 2404.53,3723.43 2411.42,3730.32 U9.31@2437.99,3730.32
  SIG/GND1 w20: L5.1@2327.76,3743.11 2351.38,3743.11 2371.06,3723.43 C47.1@2381.89,3723.43
MCU2_VLXSMPS: L4.2 U9.33 | length 39.4
  SIG/GND1 w12: L4.2@2398.62,3690.94 U9.33@2437.99,3690.94
NetANT1_1: ANT1.1 C57.1 L6.2 | length 149.6
  SIG/GND1 w5.12: ANT1.1@2148.62,4007.87 C57.1@2267.72,4007.87 L6.2@2298.23,4007.87
NetANT2_1: ANT2.1 C79.1 L9.2 | length 149.6
  SIG/GND1 w5.12: L9.2@3449.8,4007.87 C79.1@3480.32,4007.87 ANT2.1@3599.41,4007.87
NetC1_1: C1.1 U1.16 | length 51.2
  SIG/GND1 w12: U1.16@2990.16,2677.17 3000,2677.17 3011.81,2665.35 C1.1@3011.81,2640.75
NetC2_1: C2.1 U1.15 | length 38.9
  SIG/GND1 w12: U1.15@2970.47,2677.17 2970.47,2659.45 2976.38,2653.54 C2.1@2976.38,2640.75
NetC2_2: C2.2 L1.1 U1.13 U1.14
NetC3_1: C3.1 D26.1 FB1.1
NetC4_1: C4.1 C5.1 FB1.2 U1.1
NetC16_1: C16.1 FB2.2 U2.10 U2.11
  other v1: 3468.5,3414.37 3492.13,3414.37 3515.75,3414.37
NetC17_1: C17.1 U2.1 | length 45.8
  SIG/GND1 w12: U2.1@3311.02,3476.38 v1(3311.02,3500.98)
  SIG/GND3 w20: C17.1@3310.04,3480.32 ccw(c3310.04,3481.3) 3311.02,3481.3 v1(3311.02,3500.98)
NetC23_1: C23.1 FB3.2 U4.10 U4.11
  other v1: 3468.5,3099.41 3492.13,3099.41 3515.75,3099.41
NetC24_1: C24.1 U4.1 | length 45.8
  SIG/GND1 w12: U4.1@3311.02,3161.42 v1(3311.02,3186.02)
  SIG/GND3 w20: C24.1@3310.04,3165.35 ccw(c3310.04,3166.34) 3311.02,3166.34 v1(3311.02,3186.02)
NetC29_1: C29.1 R20.1 U6.1 | length 74.8
  SIG/GND3 w12: U6.1@2799.61,3285.43 2800.1,3284.94 2838.09,3284.94 C29.1@2838.58,3284.45 R20.1@2874.02,3284.45
NetC37_1: C37.1 C38.1 FB8.1 U9.23 | length 93.5
  SIG/GND1 w12: U9.23@2482.28,3873.03 v1(2482.28,3902.56)
  SIG/GND3 w20: FB8.1@2448.82,3933.07 C38.1@2448.82,3902.56 v1(2482.28,3902.56)
NetC49_1: C49.1 C50.1 FB9.1 U9.8 | length 142
  SIG/GND1 w12: U9.8@2703.74,3769.69 2726.38,3769.69 2734.25,3777.56 2753.94,3777.56
  SIG/GND1 w20: 2753.94,3777.56 C49.1@2771.65,3777.56 C50.1@2807.09,3777.56 FB9.1@2842.52,3777.56
NetC52_1: C52.1 U9.2 Y1.1 | length 156.5
  SIG/GND1 w6: U9.2@2703.74,3651.57 cw(c2703.74,3577.81) 2755.9,3629.97 C52.1@2775.61,3610.26 cw(c2736.11,3570.76) 2791.97,3570.76 Y1.1@2791.97,3543.94
NetC53_1: C53.1 U9.3 Y1.2 | length 175
  SIG/GND1 w6: U9.3@2703.74,3671.26 2712.47,3671.26 cw(c2712.47,3571.26) 2783.19,3641.97 C53.1@2795.26,3629.9 ccw(c2834.76,3669.4) 2834.76,3613.54 Y1.2@2861.57,3613.54
NetC54_1: C54.1 U9.24 Y2.1 | length 171.5
  SIG/GND1 w6: Y2.1@2305.12,3913.39 ccw(c2309.87,3913.39) 2306.51,3910.03 2318.9,3897.64 ccw(c2349.79,3928.53) 2349.79,3884.84 C54.1@2385.83,3884.84 2400.69,3884.84 cw(c2400.69,3861.32) 2417.32,3877.95 ccw(c2429.2,3889.83) 2429.2,3873.03 U9.24@2462.6,3873.03
NetC55_1: C55.1 U9.25 Y2.3 | length 92.2
  SIG/GND1 w6: Y2.3@2348.43,3858.27 ccw(c2355.55,3865.4) 2355.55,3855.32 C55.1@2385.83,3855.32 2399.88,3855.32 cw(c2399.88,3844.38) 2407.61,3852.11 ccw(c2416.51,3861.02) 2416.51,3848.43 U9.25@2437.99,3848.43
NetC56_1: C56.1 L6.1 U10.A1 | length 148
  SIG/GND1 w5.12: L6.1@2331.69,4007.87 C56.1@2362.2,4007.87 2387.71,4007.87 cw(c2387.71,3907.87) 2458.42,3978.58 U10.A1@2467.91,3969.1
NetC59_1: C59.1 C60.1 FB11.1 U11.23 | length 33.5
  SIG/GND1 w12: U11.23@3226.38,3873.03 v1(3226.38,3906.5)
NetC71_1: C71.1 C72.1 FB12.1 U11.8 | length 102
  SIG/GND1 w15: U11.8@3447.83,3769.69 v1(3481.3,3769.68)
  SIG/GND3 w20: C72.1@3465.55,3803.15 3465.55,3793.31 3481.3,3777.56 v1(3481.3,3769.68) FB12.1@3509.84,3769.68
NetC74_1: C74.1 U11.2 Y3.1 | length 144.2
  SIG/GND1 w6: U11.2@3447.83,3651.57 3467.18,3651.57 cw(c3467.18,3634.66) 3479.14,3646.62 ccw(c3488.56,3656.05) 3488.56,3642.72 C74.1@3509.84,3642.72 3521.65,3642.72 cw(c3521.65,3599.41) Y3.1@3564.96,3599.41
NetC75_1: C75.1 U11.3 Y3.2 | length 125.1
  SIG/GND1 w6: U11.3@3447.83,3671.26 3448.33,3671.75 3509.35,3671.75 C75.1@3509.84,3672.24 ccw(c3509.84,3743.53) 3560.25,3693.12 Y3.2@3564.96,3697.83
NetC76_1: C76.1 U11.24 Y4.1 | length 166.4
  SIG/GND1 w6: Y4.1@3122.29,4003.3 3122.05,4003.06 3122.05,3980.32 ccw(c3160.07,3980.32) 3133.18,3953.43 C76.1@3161.42,3925.2 3171.6,3915.02 cw(c3158.16,3901.57) 3177.17,3901.57 ccw(c3196.17,3901.57) 3182.73,3888.13 3191.57,3879.3 ; 3191.58,3879.29 ccw(c3206.69,3894.42) U11.24@3206.69,3873.03
NetC77_1: C77.1 U11.25 Y4.3 | length 111.8
  SIG/GND1 w6: Y4.3@3113.93,3933.71 3113.93,3933.31 C77.1@3141.73,3905.51 3170.26,3876.99 cw(c3141.69,3848.43) U11.25@3182.09,3848.43
NetC78_1: C78.1 L9.1 U12.A1 | length 112
  SIG/GND1 w5.12: U12.A1@3308.59,3991.8 cw(c3347.39,3953.01) 3347.39,4007.87 C78.1@3385.83,4007.87 L9.1@3416.34,4007.87
NetC83_1: C83.1 U13.9 | length 50.7
  SIG/GND1 w12: U13.9@2446.85,3190.94 v1(2446.85,3214.57)
  SIG/GND3 w20: C83.1@2440.94,3189.96 2440.94,3208.66 v1(2446.85,3214.57)
NetD4_2: D4.2 U9.18 | length 1192.3
  SIG/GND1 w8: v1(2571.31,4004.38) 2556.77,3989.84 2556.77,3955.04 2580.71,3931.1 U9.18@2580.71,3873.03
  SIG/GND3 w10: v1(2571.31,4004.38) 2597.98,4004.38 2610.24,3992.13 2610.24,3944.88 2637.8,3917.32 2736.22,3917.32 2842.52,3811.02 2929.13,3811.02 2964.57,3775.59 2964.57,3539.37 2897.64,3472.44 2779.53,3472.44 2738.19,3431.11 2738.19,3412.76 2737.8,3412.36 D4.2@2737.8,3409.45
NetD5_2: D5.2 R15.2 R16.1 R21.2 T23.0 | length 410.1
  SIG/GND3 w6: R16.1@2741.14,3149.61 2741.14,3101.38 2748.03,3094.49 T23.0@2748.03,3062.99
  SIG/GND3 w15: D5.2@2737.8,3346.46 2696.85,3346.46 2661.42,3311.02 2661.42,3208.66 2676.18,3193.9 R21.2@2704.72,3193.9 2719.49,3193.9 2724.41,3188.98 R15.2@2741.14,3188.98 R16.1@2741.14,3149.61
NetD20_1: D20.1 R28.2 | length 48.6
  SIG/GND1 w8: R28.2@2804.13,3437.01 2818.9,3437.01 2828.74,3427.17 D20.1@2848.62,3427.17
NetD20_3: D20.3 R32.1 | length 116.2
  SIG/GND1 w8: R32.1@2804.13,3366.14 2822.83,3366.14 2834.65,3377.95 2889.76,3377.95 2899.41,3387.6 D20.3@2899.41,3399.61
NetD20_4: D20.4 R29.1 | length 45.3
  SIG/GND1 w8: R29.1@2804.13,3401.57 2822.83,3401.57 2824.8,3399.61 D20.4@2848.62,3399.61
NetD21_2: D21.2 Q1.D U8.2
  other v1: 2062.99,2385.83 2088.19,2385.83
NetD22_2: D22.2 LS1.2 Q2.D | length 102
  SIG/GND3 w20: v1(2314.96,2576.38) Q2.D@2416.93,2576.38
NetD23_1: D23.1 R16.2 S1.3 S1.4 | length 325.1
  SIG/GND1 w12: S1.3@2764.61,3128.5 2802.29,3128.5 2824.49,3106.3 2921.26,3106.3 2943.46,3128.5 S1.4@2981.15,3128.5
  SIG/GND1 w20: S1.4@2981.15,3128.5 2981.7,3127.95 D23.1@3033.46,3127.95
  SIG/GND3 w12: v1(2763.78,3118.11) 2778.54,3132.87 R16.2@2778.54,3149.61
NetJ1_A5: J1.A5 R66.2 | length 78.2
  SIG/GND1 w8: R66.2@3346.44,2657.46 3366.14,2637.75 3366.14,2627.25 J1.A5@3394.34,2599.06
NetJ1_B5: J1.B5 R67.2 | length 79.5
  SIG/GND1 w8: R67.2@3417.34,2728.37 3437.05,2708.66 3451.77,2708.66 J1.B5@3477.85,2682.58
NetL2_1: L2.1 U2.6 U2.7
NetL2_2: L2.2 U2.8 U2.9
NetL3_1: L3.1 U4.6 U4.7
NetL3_2: L3.2 U4.8 U4.9
NetL4_1: L4.1 L5.2 | length 38.6
  SIG/GND1 w20: L5.2@2327.76,3693.9 2330.71,3690.94 L4.1@2365.16,3690.94
NetL7_1: L7.1 L8.2 | length 38.6
  SIG/GND1 w20: L8.2@3071.85,3693.9 3074.8,3690.94 L7.1@3109.25,3690.94
NetQ1_G: Q1.G R30.2 | length 49.8
  SIG/GND3 w8: R30.2@2065.94,2582.68 2065.94,2569.55 2076.77,2558.72 Q1.G@2076.77,2537.4
NetQ2_G: Q2.G R33.2 | length 49.8
  SIG/GND3 w8: R33.2@2369.09,2720.47 2369.09,2707.34 2379.92,2696.52 Q2.G@2379.92,2675.2
NetR1_1: R1.1 R3.2 U1.7 | length 70.1
  SIG/GND1 w8: U1.7@2950.79,2787.4 2950.79,2804.13 2953.74,2807.09 R3.2@2953.74,2826.77 R1.1@2983.27,2826.77
NetR5_2: R5.2 U1.4 | length 67
  SIG/GND1 w8: U1.4@3015.75,2761.81 3015.75,2783.46 3037.4,2805.12 R5.2@3052.17,2805.12
NetR6_2: R6.2 U1.9 | length 98.8
  SIG/GND1 w8: R6.2@2857.28,2826.77 2857.28,2808.07 2866.14,2799.21 2889.76,2799.21 2905.51,2783.46 U1.9@2905.51,2761.81
NetR10_1: R10.1 R11.2 U3.4 | length 73.5
  SIG/GND3 w8: R10.1@3492.15,2440.97 R11.2@3511.79,2460.61 3500.43,2471.97 3500.43,2491.3 U3.4@3493.12,2498.61
NetR15_1: R15.1 U6.3 | length 54
  SIG/GND3 w15: R15.1@2778.54,3188.98 2778.54,3204.41 2799.61,3225.47 U6.3@2799.61,3234.25
NetR21_1: R21.1 R24.1 U9.11 | length 1180.9
  SIG/GND1 w8: U9.11@2703.74,3828.74 2722.44,3828.74 2728.35,3834.65 2728.35,3846.46 v1(2740.16,3858.27)
  SIG/GND3 w8: R21.1@2704.72,3160.43 2662.4,3160.43 2633.86,3188.98 2633.86,3322.83 2685.04,3374.02 2685.04,3413.39 2767.72,3496.06 2883.8,3496.06 2944.88,3557.14 2944.88,3759.71 2913.25,3791.34 2834.65,3791.34 2767.72,3858.27 v1(2740.16,3858.27)
  SIG/GND3 w15: R24.1@2704.72,3130.91 R21.1@2704.72,3160.43
NetR41_2: R41.2 R42.2 U13.4 | length 81.5
  SIG/GND1 w8: U13.4@2505.91,3139.76 2532.48,3139.76 R41.2@2546.26,3153.54 R42.2@2546.26,3188.98
NetR44_1: R44.1 R47.2 U13.6 | length 72.1
  SIG/GND1 w8: v1(2503.94,3212.6) 2505.55,3210.98 2505.55,3191.3 U13.6@2505.91,3190.94
  SIG/GND3 w8: v1(2503.94,3212.6) 2504.43,3212.11 2504.43,3193.41 R44.1@2504.92,3192.91 R47.2@2534.45,3192.91
NetR45_1: R45.1 R48.2 U13.5 | length 45.2
  SIG/GND1 w12: U13.5@2505.91,3159.45 v1@2521.56,3159.45
  SIG/GND3 w20: R45.1@2504.92,3157.48 R48.2@2534.45,3157.48
  other v1: 2521.56,3159.76
NetR46_1: R46.1 R49.2 U13.17 | length 94.9
  SIG/GND1 w12: v1(2303.15,3122.05) 2320.87,3139.76 U13.17@2328.74,3139.76
  SIG/GND3 w12: v1(2303.15,3122.05) R46.1@2329.72,3122.05 R49.2@2329.72,3086.61
NetR50_1: R50.1 U13.15 | length 53
  SIG/GND1 w12: v1(2303.15,3192.91) 2304.13,3191.93 2327.76,3191.93 U13.15@2328.74,3190.94
  SIG/GND3 w12: v1(2303.15,3192.91) R50.1@2329.72,3192.91
NetR52_1: R52.1 U13.16 | length 56.9
  SIG/GND1 w12: v1(2301.18,3159.45) U13.16@2328.74,3159.45
  SIG/GND3 w12: v1(2301.18,3159.45) 2302.17,3158.46 2328.74,3158.46 R52.1@2329.72,3157.48
NetR58_1: R58.1 R59.2 U14.1 | length 117
  SIG/GND1 w8: U14.1@2549.21,3273.62 v1(2588.58,3273.62)
  SIG/GND3 w8: R59.2@2559.06,3325.79 R58.1@2559.06,3296.26 2581.6,3296.26 2588.58,3289.28 v1(2588.58,3273.62)
NetR69_1: R69.1 R70.2 | length 31.5
  SIG/GND1 w10: R69.1@2244.09,3380.91 R70.2@2244.09,3412.4
NetT28_0: T28.0 U9.17 U11.45 | length 1313.8
  SIG/GND1 w6: U9.17@2600.39,3873.03 2600.39,4004.68 2619.33,4023.62 2682.32,4023.62 2695.73,4010.22 2695.73,3949.94 2712.6,3933.07 2740.16,3933.07 2771.65,3901.57 2771.65,3854.33 2799.21,3826.77 2979.71,3826.77 3023.62,3782.86 T28.0@3023.62,3593.88 3050.57,3566.93 3141.73,3566.93 3157.48,3551.18 3309.11,3551.18 3320.92,3562.99 3350.39,3562.99 3364.17,3576.77 U11.45@3364.17,3607.28
NetT29_0: T29.0 U9.47 U11.46 | length 902
  SIG/GND1 w6: U9.47@2659.45,3607.28 2659.45,3588.58 2669.29,3578.74 2703.4,3578.74 2724.41,3557.73 2724.41,3500 2740.16,3484.25 2826.77,3484.25 2889.76,3547.24 3015.75,3547.24 3031.5,3531.5 T29.0@3098.43,3531.5 3145.67,3531.5 3153.54,3539.37 3314.01,3539.37 3325.82,3551.18 3358.27,3551.18 3383.86,3576.77 U11.46@3383.86,3607.28
NetT30_0: T30.0 U9.46 U11.47 | length 950.2
  SIG/GND1 w6: U9.46@2639.76,3607.28 2639.76,3584.65 2657.48,3566.93 2698.51,3566.93 2712.6,3552.84 2712.6,3495.11 2735.27,3472.44 2831.66,3472.44 2871.03,3511.81 T30.0@2984.25,3511.81 3019.68,3511.81 3031.5,3500 3137.8,3500 3165.35,3527.56 3318.9,3527.56 3330.71,3539.37 3366.14,3539.37 3403.54,3576.77 U11.47@3403.54,3607.28
REGN: C6.1 R1.2 U1.2 | length 148.5
  SIG/GND1 w12: U1.2@3015.75,2722.44 3029.53,2722.44 3041.34,2734.25 v1(3052.17,2734.25)
  SIG/GND3 w12: v1(3016.73,2826.77) 3016.73,2769.69 v1(3052.17,2734.25)
RGB_BLUE: R32.2 U9.30 | length 894.6
  SIG/GND1 w6: v1(2283.46,3681.1) 2283.46,3755.91 2303.71,3776.15 2393.14,3776.15 2419.29,3750 U9.30@2437.99,3750
  SIG/GND1 w8: v1(2535.43,3482.34) 2557.03,3482.34 2572.78,3466.59 2623.96,3466.59 2724.41,3366.14 R32.2@2770.67,3366.14
  SIG/GND3 w8: v1(2283.46,3681.1) 2326.77,3637.8 2326.77,3589.32 2384.59,3531.5 2429.13,3531.5 2478.29,3482.34 v1(2535.43,3482.34)
RGB_GREEN: R29.2 U9.29 | length 847.5
  SIG/GND1 w6: v1(2318.9,3795.28) 2346.46,3795.28 2354.33,3787.4 2401.57,3787.4 2419.29,3769.69 U9.29@2437.99,3769.69
  SIG/GND1 w8: v1(2559.06,3503.94) 2579.7,3483.3 2630.88,3483.3 2712.6,3401.57 R29.2@2770.67,3401.57
  SIG/GND3 w8: v1(2318.9,3795.28) 2318.9,3704.72 2342.52,3681.1 2342.52,3595.84 2391.11,3547.24 2484.25,3547.24 2527.56,3503.94 v1(2559.06,3503.94)
RGB_RED: R28.1 U9.28 | length 822.8
  SIG/GND1 w6: v1(2338.58,3822.83) 2362.2,3799.21 2409.45,3799.21 2419.29,3789.37 U9.28@2437.99,3789.37
  SIG/GND1 w8: v1(2535.43,3527.56) 2570.87,3527.56 2598.43,3500 2637.8,3500 2700.79,3437.01 R28.1@2770.67,3437.01
  SIG/GND3 w8: v1(2338.58,3822.83) 2338.58,3807.09 2346.46,3799.21 2346.46,3708.66 2358.27,3696.85 2358.27,3602.36 2397.64,3562.99 2500,3562.99 v1(2535.43,3527.56)